# Altium PCB MT29 - Chipset 2GBiT Parallel.PcbDoc
Units mil, origin at the board's own origin, x right, y up, seen from the top; angles counter-clockwise.
Board outline 2275.03 x 1175.03 mil, 2 copper layers (Top Layer, Bottom Layer); 19 components, 25 nets, 98 pads, 12 vias.
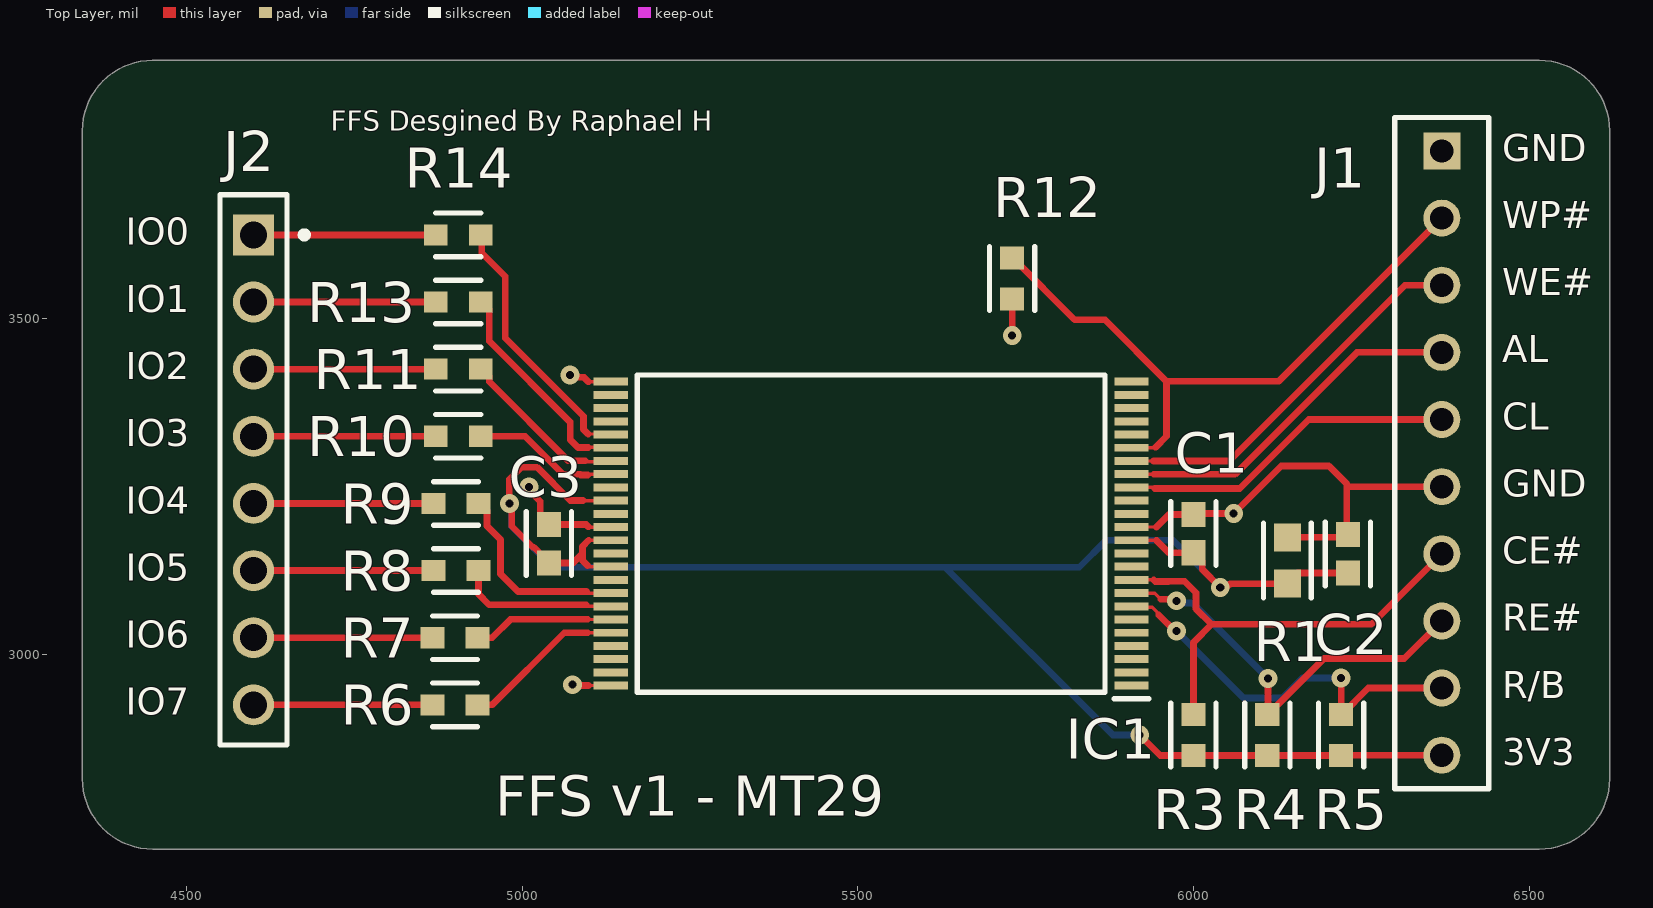
[diagram p0: Top Layer view]
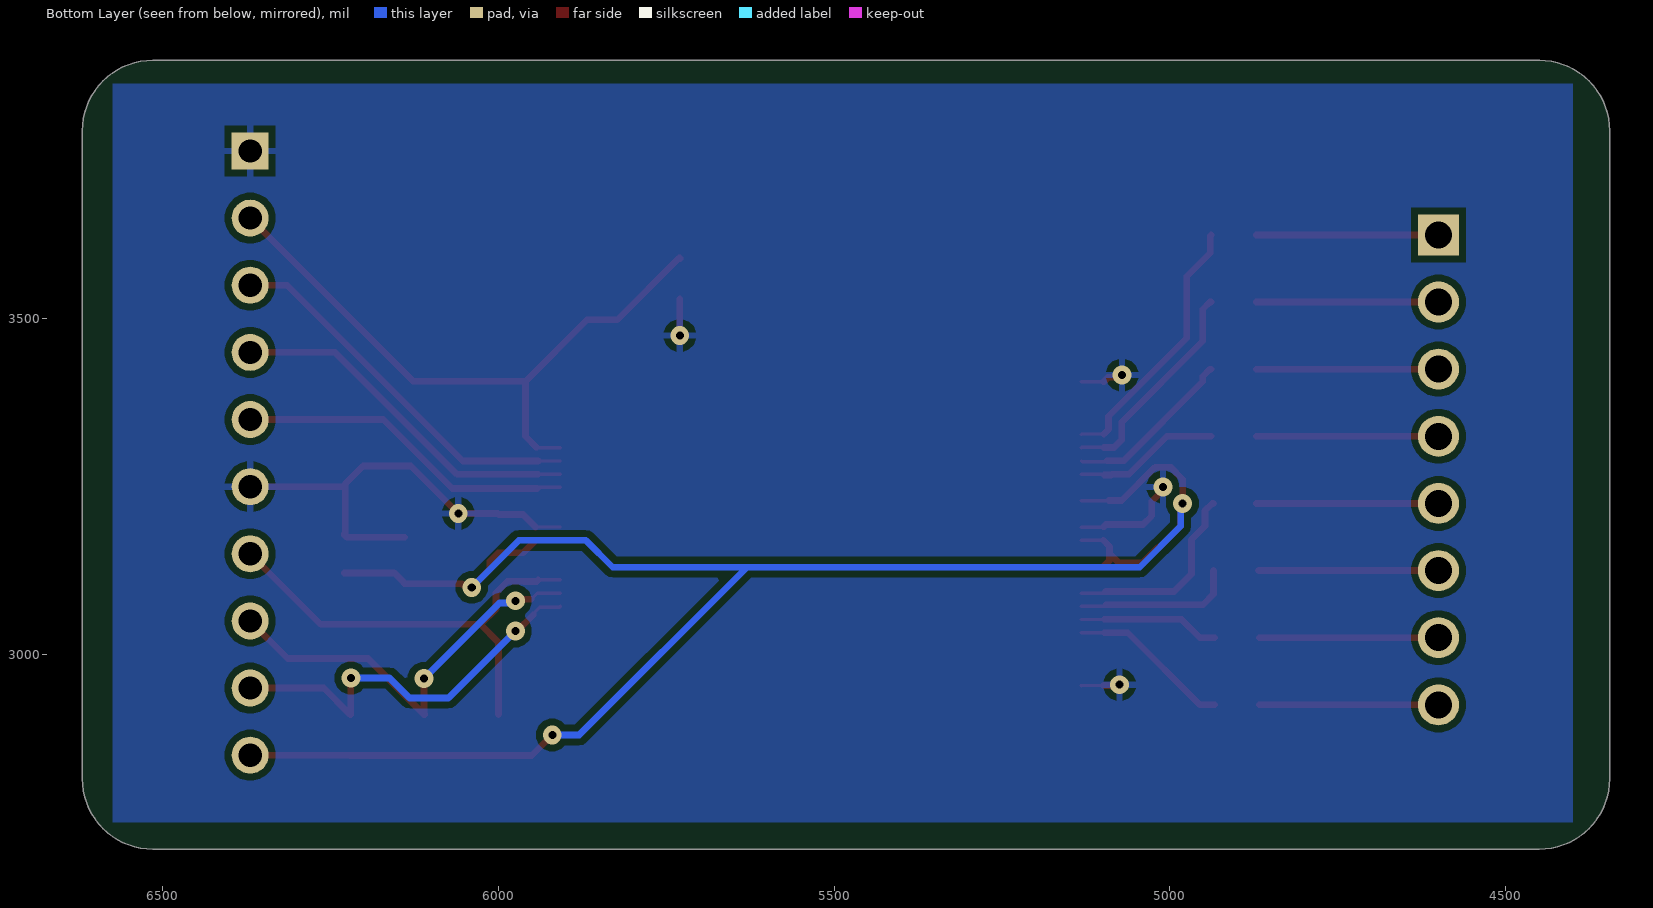
[diagram p1: Bottom Layer view, seen from below]
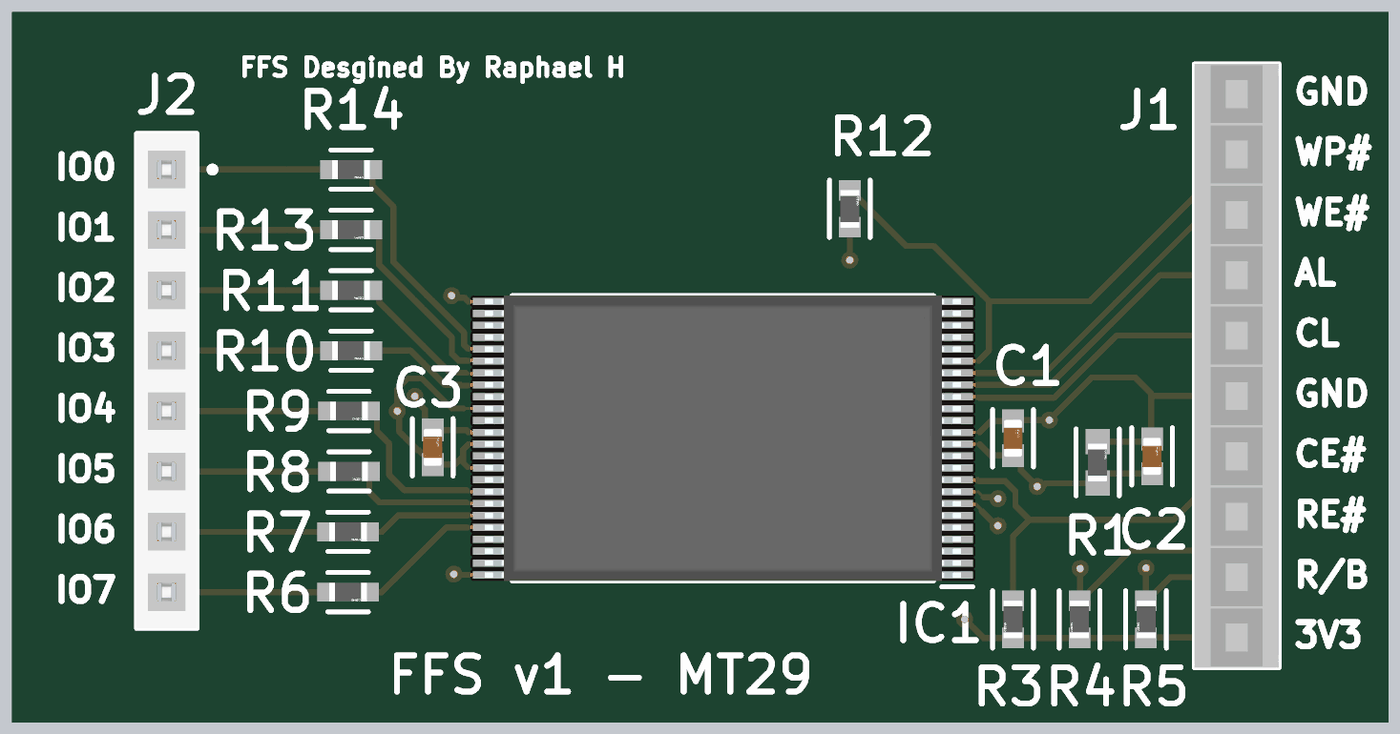
[diagram p2: 3D render of the assembled board from above, using the file's embedded part models]

## Layer stack, top to bottom
Top Solder: solder mask 0.4, Solder Resist, Dk 3.5
Top Layer: signal copper 1.4
Dielectric 1: dielectric 12.6, FR-4, Dk 4.8
Bottom Layer: signal copper 1.4
Bottom Solder: solder mask 0.4, Solder Resist, Dk 3.5

## Board outline
4344.98,2815 4344.98,3730 4344.99,3730.02 4344.99,3780 cw(c4450,3780) 4449.94,3885.01 4450,3885.02 6395,3885.01 6320,3885.01 6515,3885.01 cw(c6515,3780) 6620.02,3780 6620.02,2915 6620.01,2815 cw(c6515,2815) 6515,2709.99 4450.04,2709.99 4450,2709.99 cw(c4450,2815)

## Design rules (kind name [scope] priority, off if disabled: settings)
Clearance [All] p1: gap=10 ignorepadtopadclearanceinfootprint=FALSE ismatrix=TRUE
PolygonConnect [All] p1: connectstyle=Relief reliefconductorwidth=10 reliefentries=4 polygonreliefangle="90 Angle" airgapwidth=10
RoutingVias [All] p1: holewidth=28 width=50 viastyle="Through Hole" minholewidth=28 minwidth=50 maxholewidth=28 maxwidth=50
SolderMaskExpansion [All] p1: expansion=4 istentingtop=FALSE
Width [All] p1: maxlimit=10 minlimit=10 preferedwidth=10
30 further rules are at their usual default settings.

## Components (designator, comment, footprint, x,y, rotation, side; value= is the part's Value field where it differs from the comment)
C1 "1uF" FP-GCM188-0_1-IPC_B 6000,3180 r90 top
C2 "1uF" FP-GCM188-0_1-IPC_B 6230,3150 r90 top
C3 "1uF" FP-GCM188-0_1-IPC_B 5040,3165 r90 top
IC1 "MT29F2G08ABAEAWP-AATX_E_TR" SOP50P2000X120-48N 5520,3180 r180 top locked
J1 "5-534237-8" TECO-5-534237-8_V 6370,3300 r270 top
J2 "PPPC081LFBN-RC" SLIN-PPPC081LFBN-RC_V 4600,3275 r270 top
R1 "62R" FP-AC0603-IPC_A 6140,3140 r90 top
R3 "10kR" FP-AC0603-IPC_B 6000,2880 r270 top
R4 "10kR" FP-AC0603-IPC_B 6110,2880 r270 top
R5 "10kR" FP-AC0603-IPC_B 6220,2880 r270 top
R6 "10R" FP-AC0603-MFG 4900,2925 r0 top
R7 "10R" FP-AC0603-MFG 4900,3025 r0 top
R8 "10R" FP-AC0603-MFG 4901.54,3125 r0 top
R9 "10R" FP-AC0603-MFG 4901.54,3225 r0 top
R10 "10R" FP-AC0603-MFG 4905,3325 r0 top
R11 "10R" FP-AC0603-MFG 4905,3425 r0 top
R12 "10kR" FP-AC0603-IPC_B 5730,3560 r90 top
R13 "10R" FP-AC0603-MFG 4905,3525 r0 top
R14 "10R" FP-AC0603-MFG 4905,3625 r0 top

## Footprints (in the part's own frame and the unit in brackets; to place one, negate y for a bottom-side part, rotate by r counter-clockwise, add the part's x,y. Pads: shape width x height; smd on the part's side, far side on the other; paste and mask are expansions set on the pad)
FP-AC0603-IPC_A [mil]
  rect 41.68x39.85 smd paste+0 mask+0: 1(-34.52,0) 2(34.52,0)
  silkscreen extent -55,-36 55,36, body extent -75,-40 75,40, height 10
FP-AC0603-IPC_B [mil]
  rect 33.81x35.91 smd paste+0 mask+0: 1(-30.58,0) 2(30.58,0)
  silkscreen extent -47,-34 47,34, body extent -57,-28 57,28, height 10
FP-AC0603-MFG [mm]
  rect 0.9x0.8 smd paste+0 mask+0: 1(-0.85,0) 2(0.85,0)
  silkscreen extent -0.85,-0.82 0.85,0.82, body extent -1.4,-0.55 1.4,0.55, height 0.25
FP-GCM188-0_1-IPC_B [mil]
  rect 37.74x35.91 smd paste+0 mask+0: 1(-28.61,0) 2(28.61,0)
  silkscreen extent -47,-34 47,34, body extent -57,-28 57,28, height 10
SLIN-PPPC081LFBN-RC_V [mm] "THD, 8-Leads, Body 20.82x2.54mm, Pitch 2.54mm"
  rect 1.55x1.55 hole 1.02: 1(-8.89,0)
  round 1.55 hole 1.02: 2(-6.35,0) 3(-3.81,0) 4(-1.27,0) 5(1.27,0) 6(3.81,0) 7(6.35,0) 8(8.89,0)
  silkscreen extent -10.41,-1.27 10.41,2.05, body extent -10.41,-1.27 10.41,1.27, height 8.5
SOP50P2000X120-48N [mm]
  rect 1.3x0.3 smd: 1(-9.85,5.75) 2(-9.85,5.25) 3(-9.85,4.75) 4(-9.85,4.25) 5(-9.85,3.75) 6(-9.85,3.25) 7(-9.85,2.75) 8(-9.85,2.25) 9(-9.85,1.75) 10(-9.85,1.25) 11(-9.85,0.75) 12(-9.85,0.25) 13(-9.85,-0.25) 14(-9.85,-0.75) 15(-9.85,-1.25) 16(-9.85,-1.75) 17(-9.85,-2.25) 18(-9.85,-2.75) 19(-9.85,-3.25) 20(-9.85,-3.75) 21(-9.85,-4.25) 22(-9.85,-4.75) 23(-9.85,-5.25) 24(-9.85,-5.75) 25(9.85,-5.75) 26(9.85,-5.25) 27(9.85,-4.75) 28(9.85,-4.25) 29(9.85,-3.75) 30(9.85,-3.25) 31(9.85,-2.75) 32(9.85,-2.25) 33(9.85,-1.75) 34(9.85,-1.25) 35(9.85,-0.75) 36(9.85,-0.25) 37(9.85,0.25) 38(9.85,0.75) 39(9.85,1.25) 40(9.85,1.75) 41(9.85,2.25) 42(9.85,2.75) 43(9.85,3.25) 44(9.85,3.75) 45(9.85,4.25) 46(9.85,4.75) 47(9.85,5.25) 48(9.85,5.75)
  silkscreen extent -10.5,-6 8.85,6.25, body extent -10,-6 10,6, height 1.2
TECO-5-534237-8_V [mm] "Receptacle, 10-Leads, Body 25.4x3.56mm, Pitch 2.54mm"
  rect 1.4x1.4 hole 0.88: 1(-11.43,0)
  round 1.4 hole 0.88: 2(-8.89,0) 3(-6.35,0) 4(-3.81,0) 5(-1.27,0) 6(1.27,0) 7(3.81,0) 8(6.35,0) 9(8.89,0) 10(11.43,0)
  silkscreen extent -12.7,-1.78 12.7,1.78, body extent -12.7,-1.78 12.7,1.78, height 8.65

## Part data
C1 C2 C3: library part CMP-2006-02357-2, "Ceramic Capacitor for Automotive 1uF  ±10% 16VDC X7R 0603 Paper T/R", Case Code (Imperial)=0603, Case Code (Metric)=1608, Dielectric=X7R, Max Operating Temperature=125°C, Min Operating Temperature=-55°C, Package Quantity=1, Ratings=AEC-Q200, Tolerance=10%, Voltage=16V, Capacitance=1uF, Case/Package=0603, Depth=0.8mm, Height=0.8mm, Lead Free="Lead Free", Length=1.6mm, Mount="Surface Mount", Packaging="Tape and Reel", Radiation Hardening=No, REACH SVHC="No SVHC", Termination=SMD/SMT, Thickness=0.035inch, Voltage Rating=16V, Voltage Rating (DC)=16V, Width=0.031inch
IC1: "Integrated Circuit", Arrow Part Number="MT29F2G08ABAEAWP-AATX:E TR", Manufacturer_Name=Micron, Mouser Part Number=340-278557-REEL, Arrow Price/Stock=https://www.arrow.com/en/products/mt29f2g08abaeawp-aatxetr/micron-technology, Datasheet Link=https://au.mouser.com/datasheet/2/671/MICT_S_A0003602039_1-2574397.pdf, Height=1.2mm, Manufacturer_Part_Number="MT29F2G08ABAEAWP-AATX:E TR", Mouser Price/Stock=https://www.mouser.co.uk/ProductDetail/Micron/MT29F2G08ABAEAWP-AATXE-TR?qs=j%252B1pi9TdxUaMl26HJ%252Bo32A%3D%3D
J1: library part CMP-002-00019-2, "Female Receptacle, Pitch 2.54 mm, 1 x 10 Position, Height 8.64 mm, Tail Length 2.92 mm, -65 to 105 degC, RoHS, Tube", Colour=Black, Current Rating=2A, Manufacturer="TE Connectivity", Max Contact Resistance=12mohm, Max Operating Temperature=105°C, Min Operating Temperature=-65°C, Package Description="Female Receptacle, Pitch 2.54 mm, 1 x 10 Position, Height 8.64 mm, Tail Length 2.92 mm", Package Quantity=22, Voltage Rating=750V, Case/Package=5-534237-8, Connector Type=Header, Contact Finish=Gold, Contact Material=Bronze, Contact Plating=Gold, Datasheet URL=http://www.te.com/commerce/DocumentDelivery/DDEController?Action=showdoc&DocId=Customer+Drawing%7F534237%7FR5%7Fpdf%7FEnglish%7FENG_CD_534237_R5.pdf%7F5-534237-8, Datasheet Version=Apr-13, Gender=Female, Lead Pitch=2.54mm, Manufacturer URL=http://www.te.com/, Mounting Technology=TH, Package Reference=5-534237-8, Packaging=Rail/Tube, Pins=10, RoHS Compliant=True, Rows=1
J2: library part CMP-002-00028-2, "Female Header, Pitch 2.54 mm, 1 x 8 Position, Height 8.5 mm, Tail Length 3.2 mm, -40 to 105 degC, RoHS, Bulk", Manufacturer=Sullins, Max Operating Temperature=105°C, Min Operating Temperature=-40°C, Package Description="Female Header, Pitch 2.54 mm, 1 x 8 Position, Height 8.5 mm, Tail Length 3.2 mm", Case/Package=PPPC081LFBN-RC, Connector Type=Header, Datasheet URL=http://sullinscorp.com/catalogs/101_PAGE114-115_.100_FEMALE_HDR.pdf, Datasheet Version=Jan-15, Gender=Female, Mounting Technology=TH, Package Reference=PPPC081LFBN-RC, RoHS Compliant=Unknown
R1: library part CMP-03412-023553-2, "RES 62Ω 1.00% 0.1W 0603", Case Code (Imperial)=0603, Case Code (Metric)=1608, Max Operating Temperature=155°C, Max Power Dissipation=100mW, Min Operating Temperature=-55°C, Resistor Type="Thick Film", Temperature Coefficient=100ppm/°C, Tolerance=1%, Voltage Rating=50V, Case/Package=0603, Features="Moisture Resistant", Height=0.022inch, Lead Free="Lead Free", Length=0.063inch, Number of Terminations=2, Packaging="Tape and Reel", Power Rating=100mW, Resistance=62R, RoHS Compliant=Yes, Series=AC, Termination=SMD/SMT, Width=0.8mm
R3 R4 R5 R12: library part CMP-03412-028406-2, "RES 910KΩ 1.00% 0.1W 0603", Case Code (Imperial)=0603, Case Code (Metric)=1608, Max Operating Temperature=155°C, Max Power Dissipation=100mW, Min Operating Temperature=-55°C, Resistance=910kR, Resistor Type="Thick Film", Temperature Coefficient=100ppm/°C, Tolerance=1%, Voltage Rating=50V, Case/Package=0603, Features="Moisture Resistant", Height=0.022inch, Length=0.063inch, Number of Terminations=2, Packaging="Tape and Reel", Power Rating=100mW, RoHS Compliant=Yes, Series=AC, Termination=SMD/SMT, Width=0.8mm
R6 R7 R8 R9 R10 R11 R13 R14: library part CMP-2000-04819-3, "RES 10Ω 1.00% 0.1W 0603", Case Code (Imperial)=0603, Case Code (Metric)=1608, Max Operating Temperature=155°C, Max Power Dissipation=100mW, Min Operating Temperature=-55°C, Package Quantity=1, Resistor Type="Thick Film", Temperature Coefficient=200ppm/°C, Tolerance=1%, Voltage Rating=50V, Working Voltage=75V, Case/Package=0603, Features="Moisture Resistant", Height=0.022inch, Lead Free="Lead Free", Length=0.063inch, Moisture Sensitivity Level=1, Number of Terminations=2, Packaging="Tape and Reel", Power Rating=100mW, Resistance=10R, RoHS Compliant=Yes, Series=AC, Technology="THICK FILM", Termination=SMD/SMT, Width=0.031inch

## Via types
v1: diameter 28, hole 12, Top Layer to Bottom Layer, tented both sides, 12 vias

## Nets (pads, with @x,y where several pads share a name; then routed paths per layer and width w, separated by ;. In a path a pad name is that pad's centre, name@x,y a point inside that pad or via, vN(x,y) a via of type N, cw(c..) or ccw(c..) an arc to the next point about the centre after c; other vN are vias at no path point)
+3V3: C1.1 C2.1 C3.1 IC1.12 IC1.34 IC1.37 IC1.39 J1.10 R1.1 R3.2 R4.2 R5.2 | length 2882
  Top Layer w5: 5090.79,3229.21 IC1.34 ; 5097.48,3130.79 IC1.39 ; 5099.18,3170.16 IC1.37 ; IC1.12 5907.95,3170 5945,3170
  Top Layer w10: v1@4976.72,3225.01 v1@4976.72,3231.66 ; v1@4981,3231.66 4981,3261 4999,3279 5022.01,3279 5071.8,3229.21 5090.79,3229.21 ; v1(4981.38,3225.01) 4984.56,3221.82 4984.56,3191.01 5015.83,3159.74 5017.57,3159.74 5040,3137.31 C3.1 5076,3136.39 5090,3150.39 ; 5097.48,3132.48 5090,3139.97 5090,3150.39 ; 5099.18,3170.16 5090,3160.98 5090,3150.39 ; v1(5920,2880) 5950.58,2849.42 R5.2 ; 5945,3170 5963.61,3151.39 C1.1 6012.96,3138.43 6012.96,3127.04 v1(6040,3100) 6043.44,3103.44 6052.82,3103.44 6054.86,3105.48 R1.1 6140,3106.4 6154.92,3121.32 6160.72,3121.32 6160.78,3121.39 C2.1 ; R5.2@6221.05,2849.42 6221.63,2850 J1.10
  Bottom Layer w10: v1(4981.38,3225.01) 4983.99,3222.39 4983.99,3191.01 5045,3130 5630,3130 ; v1(5920,2880) 5880,2880 5630,3130 ; v1(6040,3100) 5970,3170 5870,3170 5830,3130 5630,3130
AL: IC1.17 J1.4 | length 537.6
  Top Layer w5: IC1.17 5940.5,3268.58 5940.82,3268.27
  Top Layer w10: 5940.82,3268.27 5948.79,3268.27 6061.7,3268.27 6243.43,3450 J1.4
CE#: IC1.9 J1.7 R3.1 | length 692.9
  Top Layer w5: IC1.9 5940.82,3111.1 5940.96,3110.96
  Top Layer w10: 5940.96,3110.96 5943.07,3108.85 5962.84,3108.85 5962.99,3109 5987.01,3109 6004,3092.01 6004,3067.99 6026.99,3045 ; R3.1 6000,3018.01 6026.99,3045 ; J1.7 6265,3045 6026.99,3045
CL: IC1.16 J1.5 | length 505.4
  Top Layer w5: IC1.16 5940.82,3248.9 5942.36,3247.36
  Top Layer w10: 5942.36,3247.36 6069.07,3247.36 6171.72,3350 J1.5
GND: C1.2 C2.2 C3.2 IC1.13 IC1.25 IC1.36 IC1.48 J1.1 J1.6 R1.2 R12.1 | length 1023
  Top Layer w5: 5098.9,2953.9 5131.93,2953.9 IC1.48 ; 5098.9,3406.1 5131.93,3406.1 IC1.25 ; 5099.51,3190.16 5099.51,3189.51 5131.87,3189.51 IC1.36 ; IC1.13 5944.84,3189.84 5945,3190
  Top Layer w10: v1(5010.51,3249.49) 5010.51,3244.62 5027.04,3228.08 5027.04,3206.57 C3.2 5095.41,3193.61 5098.87,3190.16 5099.51,3190.16 ; v1(5071.22,3416.22) 5074.66,3412.78 5092.22,3412.78 5098.9,3406.1 ; v1(5075,2955) 5076.1,2953.9 5098.9,2953.9 ; v1(5730,3475) R12.1 ; 5945,3190 5963.61,3208.61 C1.2 6001.39,3210 v1(6060,3210) 6130.75,3280.75 6201.73,3280.75 6228.54,3253.94 6228.54,3250 ; R1.2 6225.91,3174.52 C2.2 6228.54,3180.07 6228.54,3250 ; J1.6 6228.54,3250
  Bottom Layer w10: v1@5006.15,3249.49 v1(5010.51,3249.49)
IO0: J2.1 R14.1 | length 271.5
  Top Layer w10: J2.1 R14.1
IO1: J2.2 R13.1 | length 271.5
  Top Layer w10: J2.2 R13.1
IO2: J2.3 R11.1 | length 271.5
  Top Layer w10: J2.3 R11.1
IO3: J2.4 R10.1 | length 271.5
  Top Layer w10: J2.4 R10.1
IO4: J2.5 R9.1 | length 271.5
  Top Layer w10: J2.5 R9.1 R9.1@4871.54,3225
IO5: J2.6 R8.1 | length 268.1
  Top Layer w10: J2.6 R8.1
IO6: J2.7 R7.1 | length 266.5
  Top Layer w10: J2.7 R7.1
IO7: J2.8 R6.1 | length 266.5
  Top Layer w10: J2.8 R6.1
NetIC1_29: IC1.29 R14.2 | length 397
  Top Layer w5: 5098.41,3328.41 5131.43,3328.41 IC1.29
  Top Layer w10: R14.2 4940,3623.46 4940,3598.14 4975,3563.14 4975,3471.43 5091.61,3354.81 5091.61,3335.2 5098.41,3328.41
NetIC1_30: IC1.30 R13.2 | length 327
  Top Layer w5: 5098.57,3308.41 5098.72,3308.57 5131.59,3308.57 IC1.30
  Top Layer w10: R13.2 4940.43,3525 4951.18,3514.25 4951.18,3466.96 5071.61,3346.53 5071.61,3320.11 5083.31,3308.41 5098.57,3308.41
NetIC1_31: IC1.31 R11.2 | length 256
  Top Layer w5: 5094.29,3288.41 5095.68,3287.01 5130.95,3287.01 IC1.31
  Top Layer w10: R11.2 4940.43,3425 4951.18,3414.25 4951.18,3406.4 5069.17,3288.41 5094.29,3288.41
NetIC1_32: IC1.32 R10.2 | length 218.3
  Top Layer w5: 5097.8,3267.2 5099.11,3268.52 5132.14,3268.52 IC1.32
  Top Layer w10: R10.2 5004.3,3325 5060.89,3268.41 5086.34,3268.41 5087.55,3267.2 5097.8,3267.2
NetIC1_41: IC1.41 R9.2 | length 296
  Top Layer w5: 5096.08,3093.92 5098.58,3091.42 IC1.41
  Top Layer w10: R9.2 4936.97,3225 4947.72,3214.25 4947.72,3191.27 4967.72,3171.27 4967.72,3120 4993.8,3093.92 5096.08,3093.92
NetIC1_42: IC1.42 R8.2 | length 239.8
  Top Layer w5: 5095.77,3073.92 5097.95,3071.73 IC1.42
  Top Layer w10: R8.2 4935,3090 4951.08,3073.92 5095.77,3073.92
NetIC1_43: IC1.43 R7.2 | length 210.2
  Top Layer w5: 5097.95,3052.36 5098.27,3052.05 IC1.43
  Top Layer w10: R7.2 4955.43,3025 4982.8,3052.36 5097.95,3052.36
NetIC1_44: IC1.44 R6.2 | length 243.2
  Top Layer w5: 5097.36,3032.36 IC1.44
  Top Layer w10: R6.2 4955.43,2925 5062.8,3032.36 5097.36,3032.36
R/B: IC1.7 J1.9 R5.1 | length 602.9
  Top Layer w5: IC1.7 5909.07,3070.45 5938.56,3070.45 5945.89,3063.13 5945.89,3061.47 5948.39,3058.97
  Top Layer w10: 5948.39,3058.97 5972.35,3035 v1(5975,3035) ; v1(6220,2965) R5.1 6221.05,2910.58 6260.47,2950 J1.9
  Bottom Layer w10: v1(5975,3035) 6074.87,2935.13 6132.5,2935.13 6162.37,2965 v1(6220,2965)
RE#: IC1.8 J1.8 R4.1 | length 627.7
  Top Layer w5: IC1.8 5907.86,3091.35 5942.41,3091.35 5951.56,3082.2
  Top Layer w10: 5951.56,3082.2 5972.8,3082.2 v1(5975,3080) ; v1(6111.07,2964.13) 6111.07,2911.65 R4.1 6111.05,2910.58 6194.47,2994 6314,2994 J1.8
  Bottom Layer w10: v1(5975,3080) 5978.44,3076.56 5998.65,3076.56 v1(6111.07,2964.13)
WE#: IC1.18 J1.3 | length 570.6
  Top Layer w5: IC1.18 5940.5,3288.27
  Top Layer w10: 5940.5,3288.27 6053.42,3288.27 6315.15,3550 J1.3
WP#: IC1.19 J1.2 R12.2 | length 958.8
  Top Layer w5: IC1.19 5942.95,3307.95 5943.58,3308.58
  Top Layer w10: R12.2@5729.42,3590 R12.2 5731.05,3590.58 5823.04,3498.59 5868.3,3498.59 5960,3406.88 ; 5943.58,3308.58 5960,3325 5960,3406.88 ; J1.2 6126.88,3406.88 5960,3406.88
pads on no net: IC1.1 IC1.2 IC1.3 IC1.4 IC1.5 IC1.6 IC1.10 IC1.11 IC1.14 IC1.15 IC1.20 IC1.21 IC1.22 IC1.23 IC1.24 IC1.26 IC1.27 IC1.28 IC1.33 IC1.35 IC1.38 IC1.40 IC1.45 IC1.46 IC1.47

## Polygon pours and split planes (outlines as drawn)
GND on Bottom Layer "GND_L02_P000" (solid, remove dead copper, pour order 0): 4400,3850 6575,3850 6575,2750 4400,2750

## Silkscreen, mask and mechanical layers (free items; w line width, h text height)
Top Overlay:
  text "FFS Desgined By Raphael H" at 4715,3780 h30
  text "GND" at 6460,3735 h40
  text "WP#" at 6460,3635 h40
  text "IO0" at 4410,3610 h40
  text "WE#" at 6460,3535 h40
  text "IO1" at 4410,3510 h40
  text "AL" at 6460,3435 h40
  text "IO2" at 4410,3410 h40
  text "CL" at 6460,3335 h40
  text "IO3" at 4410,3310 h40
  text "GND" at 6460,3235 h40
  text "IO4" at 4410,3210 h40
  text "CE#" at 6460,3135 h40
  text "IO5" at 4410,3110 h40
  text "RE#" at 6460,3035 h40
  text "IO6" at 4410,3010 h40
  text "R/B" at 6460,2935 h40
  text "IO7" at 4410,2910 h40
  text "3V3" at 6460,2835 h40
  text "FFS v1 - MT29" at 4960,2760 h60
Mechanical 1:
  lines w10: 4350,3680 4350,3780 cw(c4450,3780) 4450,3880 6395,3880 ; 4350,3730 4350,2815 ccw(c4450,2815) 4450,2715 6515,2715 ccw(c6515,2815) 6615,2815 6615,2915 6615,3190 ; 6320,3880 6515,3880 cw(c6515,3780) 6615,3780 6615,3505 ; 6615,3075 6615,3625